# Altium PCB Модуль STM32F108VBT6.PcbDoc
Units mm, origin at the board's own origin, x right, y up, seen from the top; angles counter-clockwise.
Board outline 60 x 40 mm, 2 copper layers (Top Layer, Bottom Layer); 20 components, 88 nets, 238 pads, 50 vias.
Unrouted connection lines stored in the file: 28.
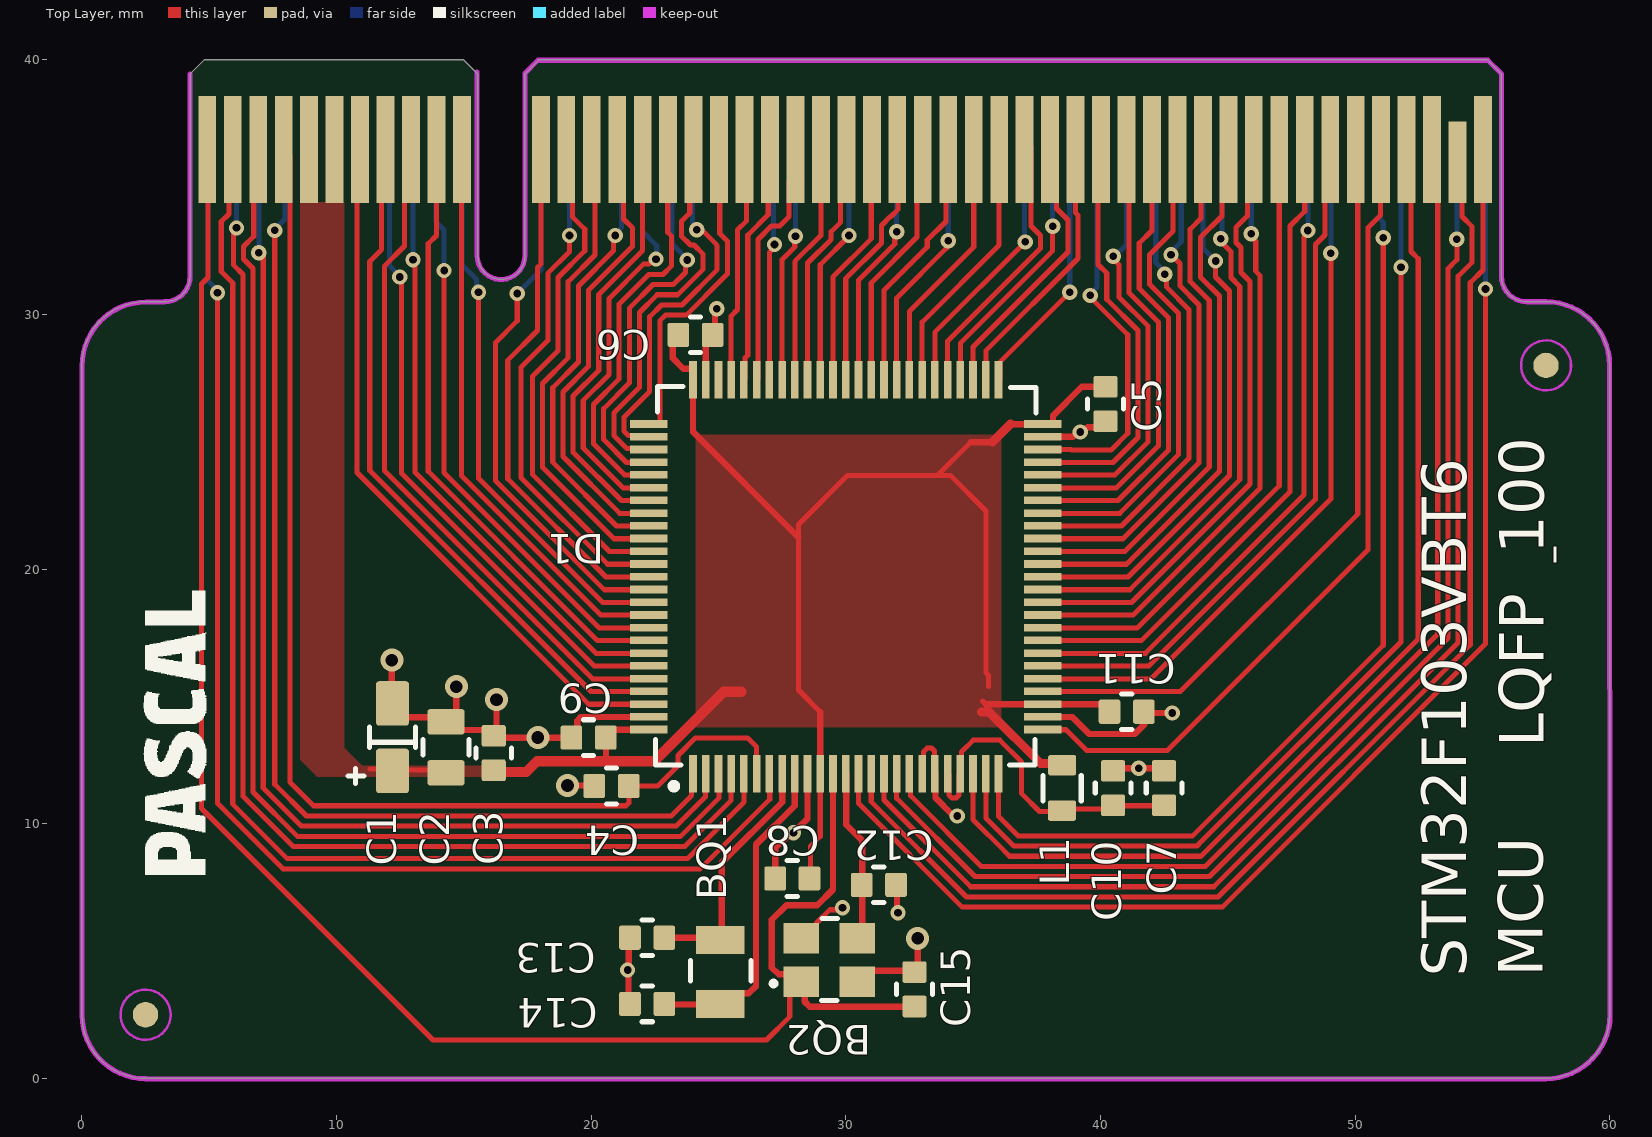
[diagram p0: Top Layer view]
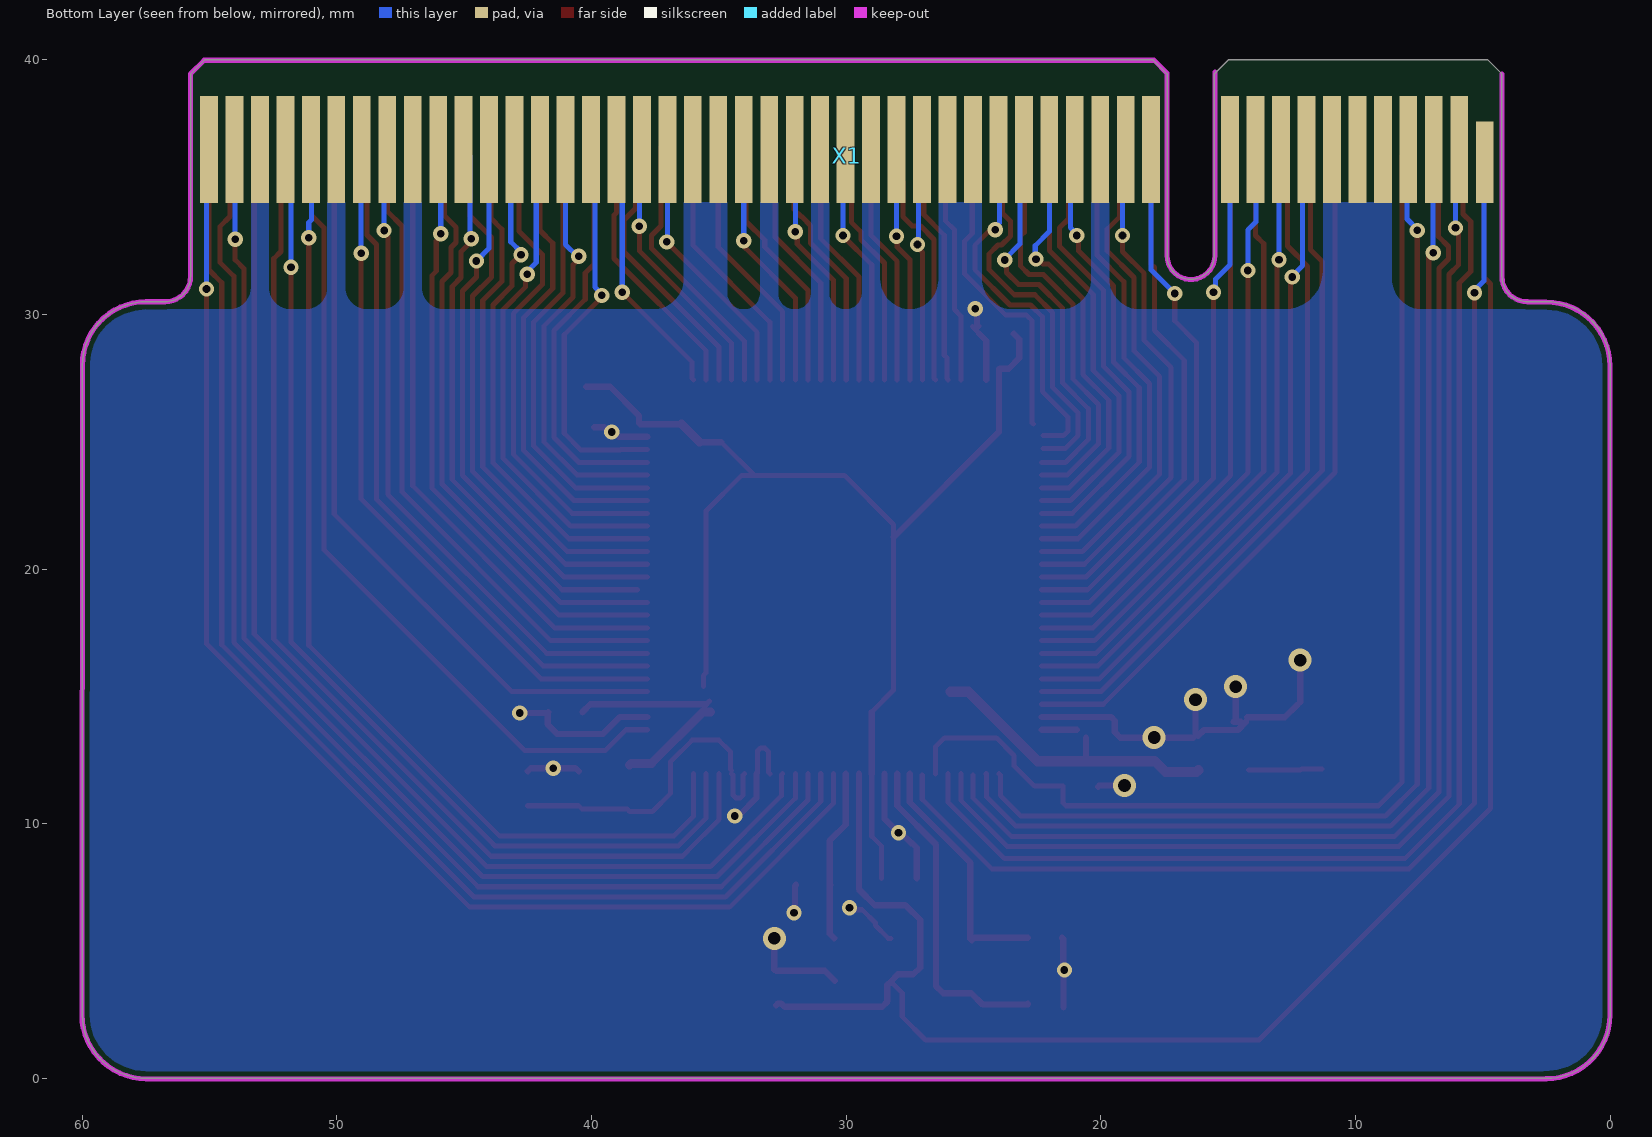
[diagram p1: Bottom Layer view, seen from below]
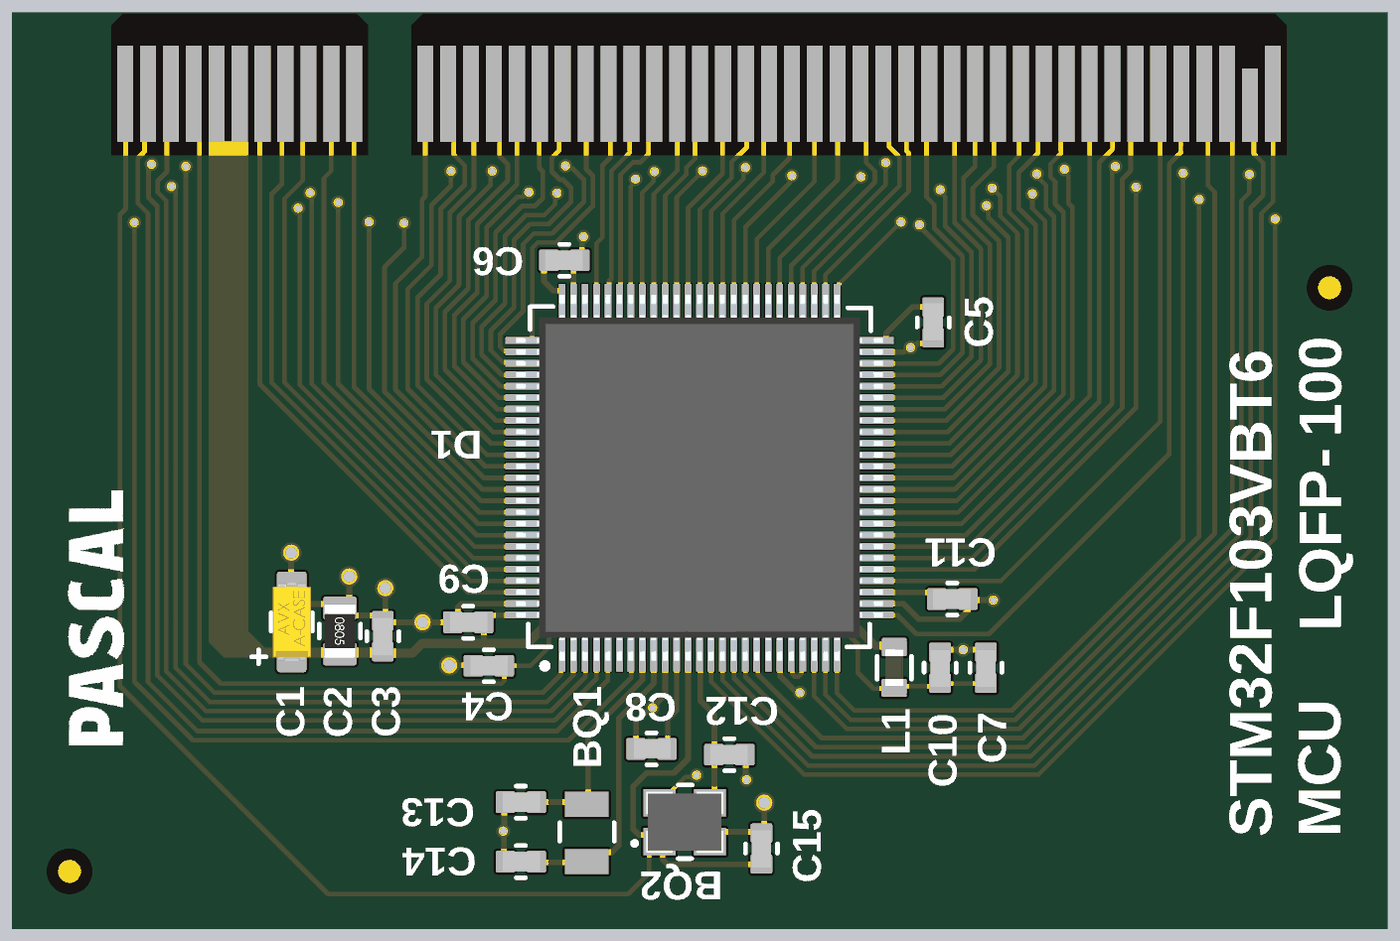
[diagram p2: 3D render of the assembled board from above, using the file's embedded part models]

## Layer stack, top to bottom
Top Solder: solder mask 0.0102, Solder Resist, Dk 3.5
Top Layer: signal copper 0.0356
Dielectric 1: dielectric 0.32, FR-4, Dk 4.8
Bottom Layer: signal copper 0.0356
Bottom Solder: solder mask 0.0102, Solder Resist, Dk 3.5

## Board outline
15,40 15.55,39.45 15.55,32.3 ccw(c16.475,32.3) 17.4,32.3 17.4,39.45 17.95,40 55.2,40 55.75,39.45 55.75,31.5 ccw(c56.75,31.5) 56.75,30.5 57.5,30.5 cw(c57.5,28) 60,28 60,2.5 cw(c57.5,2.5) 57.5,0 2.5,0 cw(c2.5,2.5) 0,2.5 0,28 cw(c2.5,28) 2.5,30.5 3.25,30.5 ccw(c3.25,31.5) 4.25,31.5 4.25,39.45 4.8,40

## Design rules (kind name [scope] priority, off if disabled: settings)
Clearance [All] p1: gap=0.2 ignorepadtopadclearanceinfootprint=FALSE
ComponentClearance [All] p1 off: gap=0.254 collisioncheckmode=3 verticalgap=0.254 showdistances=FALSE
Height [All] p1 off: minheight=0 maxheight=25.4 prefheight=12.7
PolygonConnect [All] p1: connectstyle=Direct reliefconductorwidth=0.254 reliefentries=4 polygonreliefangle="90 Angle" airgapwidth=0.254
RoutingVias [All] p1: holewidth=0.5 width=0.9 viastyle="Through Hole" minholewidth=0.3 minwidth=0.6 maxholewidth=0.711 maxwidth=1.27
SolderMaskExpansion [All] p1: expansion=-0.8 istentingtop=FALSE soldermaskfromhole=TRUE
Width [All] p1: maxlimit=0.5 minlimit=0.2 preferedwidth=0.25 minimp=50.000000 maximp=50.000000 favimp=50.000000
28 further rules are at their usual default settings.

## Classes and differential pairs
component class "Модуль STM32F108VBT6": BQ1 BQ2 C1 C2 C3 C4 C5 C6 C7 C8 C9 C10 C11 C12 C13 C14 C15 L1
component class "Модуль STM32F108VBT6_2": D1 X1

## Components (designator, comment, footprint, x,y, rotation, side; value= is the part's Value field where it differs from the comment)
BQ1 "3215" SMD3215_2P32768KHZ125PF10PPM 25.075,4.175 r270 top value="32,768 кГц"
BQ2 "кварцевый резонатор_1" SMD3225_4P20MHZ20PF10PPM 29.35,4.65 r0 top value="8 МГц"
C1 "A-case" K53-68_3216(A) 12.2,13.4 r90 top value="10 мк"
C2 "0805" K10-69B_2.0_1.25(0805) 14.3,13 r270 top value="1 мк"
C3 "0603" K10-79_1.6_0.8(0603) 16.175,12.775 r270 top value="0,1 мк"
C4 "0603" K10-79_1.6_0.8(0603) 20.8,11.483 r0 top value="0,01 мк"
C5 "0603" K10-79_1.6_0.8(0603) 40.2,26.483 r90 top value="0,01 мк"
C6 "0603" K10-79_1.6_0.8(0603) 24.1,29.2 r180 top value="0,01 мк"
C7 "0603" K10-79_1.6_0.8(0603) 42.5,11.4 r270 top value="0,1 мк"
C8 "0603" K10-79_1.6_0.8(0603) 27.9,7.85 r0 top value="0,01 мк"
C9 "0603" K10-79_1.6_0.8(0603) 19.9,13.383 r0 top value="0,01 мк"
C10 "0603" K10-79_1.6_0.8(0603) 40.5,11.4 r270 top value="0,01 мк"
C11 "0603" K10-79_1.6_0.8(0603) 41.033,14.4 r180 top value="0,01 мк"
C12 "0603" K10-79_1.6_0.8(0603) 31.3,7.6 r180 top value=30
C13 "0603" K10-79_1.6_0.8(0603) 22.2,5.525 r0 top value=15
C14 "0603" K10-79_1.6_0.8(0603) 22.2,2.925 r0 top value=15
C15 "0603" K10-79_1.6_0.8(0603) 32.7,3.5 r270 top value=30
D1 "(LQFP-48) Xilinx" QFP50P1600X1600X160-100N 30,19.7 r90 top value=STM32F103VBT6
L1 "0603" 742792651 38.5,11.4 r270 top value=TL160808
X1 "KONT_POLE_MEZ" 3113-112t_otv 31.026,35.978 r180 bottom

## Footprints (in the part's own frame and the unit in brackets; to place one, negate y for a bottom-side part, rotate by r counter-clockwise, add the part's x,y. Pads: shape width x height; smd on the part's side, far side on the other; paste and mask are expansions set on the pad)
3113-112t_otv [mm]
  rect 0.7x3.2 smd: A1(26.1,0)
  rect 0.7x4.2 smd: A2(25.1,0.5) A3(24.1,0.5) A4(23.1,0.5) A5(22.1,0.5) A6(21.1,0.5) A7(20.1,0.5) A8(19.1,0.5) A9(18.1,0.5) A10(17.1,0.5) A11(16.1,0.5) A12(13,0.5) A13(12,0.5) A14(11,0.5) A15(10,0.5) A16(9,0.5) A17(8,0.5) A18(7,0.5) A19(6,0.5) A20(5,0.5) A21(4,0.5) A22(3,0.5) A23(2,0.5) A24(1,0.5) A25(0,0.5) A26(-1,0.5) A27(-2,0.5) A28(-3,0.5) A29(-4,0.5) A30(-5,0.5) A31(-6,0.5) A32(-7,0.5) A33(-8,0.5) A34(-9,0.5) A35(-10,0.5) A36(-11,0.5) A37(-12,0.5) A38(-13,0.5) A39(-14,0.5) A40(-15,0.5) A41(-16,0.5) A42(-17,0.5) A43(-18,0.5) A44(-19,0.5) A45(-20,0.5) A46(-21,0.5) A47(-22,0.5) A48(-23,0.5) A49(-24,0.5)
  rect 0.7x4.2 smd far side: B1(26.1,0.5) B2(25.1,0.5) B3(24.1,0.5) B4(23.1,0.5) B5(22.1,0.5) B6(21.1,0.5) B7(20.1,0.5) B8(19.1,0.5) B9(18.1,0.5) B10(17.1,0.5) B11(16.1,0.5) B12(13,0.5) B13(12,0.5) B14(11,0.5) B15(10,0.5) B16(9,0.5) B17(8,0.5) B18(7,0.5) B19(6,0.5) B20(5,0.5) B21(4,0.5) B22(3,0.5) B23(2,0.5) B24(1,0.5) B25(0,0.5) B26(-1,0.5) B27(-2,0.5) B28(-3,0.5) B29(-4,0.5) B30(-5,0.5) B31(-6,0.5) B32(-7,0.5) B33(-8,0.5) B34(-9,0.5) B35(-10,0.5) B36(-11,0.5) B37(-12,0.5) B38(-13,0.5) B39(-14,0.5) B40(-15,0.5) B41(-16,0.5) B42(-17,0.5) B43(-18,0.5) B44(-19,0.5) B45(-20,0.5) B46(-21,0.5) B47(-22,0.5) B49(-24,0.5)
  rect 0.7x3.2 smd far side: B48(-23,0)
742792651 [mm]
  rrect20% 0.8x1.1 smd mask+0.102: 1(-0.9,0) 2(0.883,-0.008)
  silkscreen extent -0.5,-0.75 0.5,0.75, body extent -0.8,-0.4 0.8,0.4, height 0.78
K10-69B_2.0_1.25(0805) [mm]
  rrect20% 1x1.45 smd mask+0.1: 1(-1,0) 2(1,0)
  silkscreen extent -0.3,-0.9 0.3,0.9, body extent -1.15,-0.67 1.15,0.68, height 0.76
K10-79_1.6_0.8(0603) [mm]
  rrect20% 0.85x0.95 smd mask+0.1: 1(-0.675,0) 2(0.675,0)
  silkscreen extent -0.2,-0.7 0.2,0.7, body extent -0.8,-0.42 0.84,0.43, height 0.41
K53-68_3216(A) [mm] "Molded Capacitor, 2-Leads, Body 3,20x1,60mm, IPC Medium Density"
  rrect20% 1.75x1.3 smd mask+0.1: 1(-1.325,0) 2(1.325,0)
  silkscreen extent -0.4,-0.9 0.4,0.9, body extent -1.7,-0.84 1.7,0.84, height 1.71
QFP50P1600X1600X160-100N [mm]
  rect 1.475x0.3 smd mask+0.05: 1(-7.738,6) 2(-7.738,5.5) 3(-7.738,5) 4(-7.738,4.5) 5(-7.738,4) 6(-7.738,3.5) 7(-7.738,3) 8(-7.738,2.5) 9(-7.738,2) 10(-7.738,1.5) 11(-7.738,1) 12(-7.738,0.5) 13(-7.738,0) 14(-7.738,-0.5) 15(-7.738,-1) 16(-7.738,-1.5) 17(-7.738,-2) 18(-7.738,-2.5) 19(-7.738,-3) 20(-7.738,-3.5) 21(-7.738,-4) 22(-7.738,-4.5) 23(-7.738,-5) 24(-7.738,-5.5) 25(-7.738,-6) 51(7.738,-6) 52(7.738,-5.5) 53(7.738,-5) 54(7.738,-4.5) 55(7.738,-4) 56(7.738,-3.5) 57(7.738,-3) 58(7.738,-2.5) 59(7.738,-2) 60(7.738,-1.5) 61(7.738,-1) 62(7.738,-0.5) 63(7.738,0) 64(7.738,0.5) 65(7.738,1) 66(7.738,1.5) 67(7.738,2) 68(7.738,2.5) 69(7.738,3) 70(7.738,3.5) 71(7.738,4) 72(7.738,4.5) 73(7.738,5) 74(7.738,5.5) 75(7.738,6)
  rect 0.3x1.475 smd mask+0.05: 26(-6,-7.738) 27(-5.5,-7.738) 28(-5,-7.738) 29(-4.5,-7.738) 30(-4,-7.738) 31(-3.5,-7.738) 32(-3,-7.738) 33(-2.5,-7.738) 34(-2,-7.738) 35(-1.5,-7.738) 36(-1,-7.738) 37(-0.5,-7.738) 38(0,-7.738) 39(0.5,-7.738) 40(1,-7.738) 41(1.5,-7.738) 42(2,-7.738) 43(2.5,-7.738) 44(3,-7.738) 45(3.5,-7.738) 46(4,-7.738) 47(4.5,-7.738) 48(5,-7.738) 49(5.5,-7.738) 50(6,-7.738) 76(6,7.738) 77(5.5,7.738) 78(5,7.738) 79(4.5,7.738) 80(4,7.738) 81(3.5,7.738) 82(3,7.738) 83(2.5,7.738) 84(2,7.738) 85(1.5,7.738) 86(1,7.738) 87(0.5,7.738) 88(0,7.738) 89(-0.5,7.738) 90(-1,7.738) 91(-1.5,7.738) 92(-2,7.738) 93(-2.5,7.738) 94(-3,7.738) 95(-3.5,7.738) 96(-4,7.738) 97(-4.5,7.738) 98(-5,7.738) 99(-5.5,7.738) 100(-6,7.738)
  silkscreen extent -8.35,6.62 -8.1,6.87, body extent -8,-8 8,8, height 1.6
SMD3215_2P32768KHZ125PF10PPM [mm]
  rect 1.1x1.9 smd mask+0.102: 1(-1.25,0) 2(1.25,0)
  silkscreen extent -0.45,-1.17 0.35,1.2
SMD3225_4P20MHZ20PF10PPM [mm]
  rect 1.4x1.2 smd paste+0 mask+0.102: 1(-1.1,-0.85)
  rect 1.4x1.2 smd mask+0.102: 2(1.1,-0.85) 3(1.1,0.85) 4(-1.1,0.85)
  body extent -1.68,-1.33 1.68,1.33, height 0.9

## Part data
BQ1: library part "кварцевый резонатор", PartNumber="32,768 кГц 3215 SMD", Company=Mercury, Package=3215
BQ2: Package=0705, PartNumber=MQ-12.000-18, Company=Mercury
C1: library part C+, Package=A-case
C2 C3 C4 C5 C6 C7 C8 C9 C10 C11 C12 C13 C14 C15: library part C
  C2: Package=0805
  C3 C4 C5 C6 C7 C8 C9 C10 C11 C12 C13 C14 C15: Package=0603
D1: library part STM32F103VBT6, Package=LQFP-48, Company=Xilinx, PurtNamber=XC6SLX25-2FGG484C
L1: library part SH6028-5R0YLB, CurrentMax=2,4А, PartNumber=TL160808, Company="ABC Electronics Group", Package=0603
X1: library part 3113-112T

## Free pads (board coordinates)
  round 1 smd paste-1 mask+0.5: 1(2.5,2.5) 1(57.5,28)

## Via types
v1: diameter 0.6, hole 0.3, Top Layer to Bottom Layer, 44 vias
v2: diameter 0.9, hole 0.5, Top Layer to Bottom Layer, 6 vias

## Nets (pads, with @x,y where several pads share a name; then routed paths per layer and width w, separated by ;. In a path a pad name is that pad's centre, name@x,y a point inside that pad or via, vN(x,y) a via of type N, cw(c..) or ccw(c..) an arc to the next point about the centre after c; other vN are vias at no path point)
3V3: C1.1 C2.2 C3.2 C5.2 C6.2 C8.2 C9.2 C11.2 D1.11 D1.28 D1.50 D1.75 D1.100 L1.1 X1.B5 X1.B6 | length 74.1
  Top Layer w0.2: 11.325,12.158 12.125,12.158 12.175,12.108 C2.2@14.208,12.108 ; 20.583,12.483 20.608,12.458 ; C8.2@28.608,7.85 28.608,9.116 29,9.508 D1.11@29,11.887 ; 29,14.391 28.141,15.25 28.141,21.25 28.141,21.75 30.073,23.683 33.608,23.683 ; 34.908,24.983 33.608,23.683 ; 35.367,14.824 35.499,14.692 ; 35.608,15.383 35.608,15.825 35.508,15.925 35.508,22.283 34.108,23.683 33.608,23.683 ; D1.50@38.088,25.692 D1.50@38.138,25.742
  Top Layer w0.25: 20.583,12.483 C9.2@20.583,13.383 ; C9.2@20.942,13.692 D1.100@22.329,13.692 ; C6.2@23.425,29.25 23.208,29.033 23.208,28.288 23.621,27.875 23.975,27.875 24,27.85 D1.75 24,25.391 28.141,21.25 ; D1.11 29,14.391 ; 34.908,24.983 35.758,24.983 ; 35.499,14.692 40.058,14.692 40.358,14.392 C11.2@40.358,14.383 ; 36.467,25.692 D1.50@38.088,25.692 ; D1.50@38.138,25.742 38.138,26.024 39.271,27.158 C5.2 C5.2@40.208,27.158
  Top Layer w0.35: 35.333,14.383 35.634,14.383 37.648,12.369 38.448,12.369 L1.1@38.508,12.309 ; 35.758,24.983 36.467,25.692
  Top Layer w0.4: C3.2 16.242,12.033 17.452,12.033 17.877,12.458 20.608,12.458 22.477,12.458 25.202,15.183 25.908,15.183
BOOT0: D1.94 X1.A9 | length 24.9
  Top Layer w0.2: v1(13.003,32.15) 13.079,32.073 13.079,23.802 20.19,16.692 D1.94@22.329,16.692
  Bottom Layer w0.2: X1.A9 13.003,36.401 v1(13.003,32.15)
BOOT1: D1.37 X1.A39 | length 22.5
  Top Layer w0.2: D1.37@38.194,19.192 41.154,19.192 45.475,23.513 45.475,31.1 45.125,31.45 45.125,32.465 44.725,32.865 v1(44.725,32.973)
  Bottom Layer w0.2: v1(44.725,32.973) 44.776,33.024 44.776,36.228 X1.A39
GND: BQ2.2 BQ2.4 C1.2 C2.1 C3.1 C4.1 C5.1 C6.1 C7.1 C8.1 C9.1 C10.1 C11.1 C12.1 C13.1 C14.1 C15.1 D1.10 D1.19 D1.20 D1.27 D1.49 D1.74 D1.99 X1.A5 X1.A6 X1.A7 X1.A14 X1.A19 X1.A20 X1.A23 X1.A25 X1.A27 X1.A29 X1.A30 X1.A41 X1.A44 X1.A47 | length 47.9
  Top Layer w0.2: C6.1@24.775,29.25 25.047,29.522 C6.1@25.037,29.531 ; BQ2.4 28.35,5.5 28.85,6 28.85,6.1 29.373,6.623 29.798,6.623 v1(29.875,6.7) ; D1.19 33.049,12.011 33.049,12.824 33.2,12.975 33.367,12.975 33.484,12.858 33.484,11.978 D1.20 ; v1@34.166,10.374 34.316,10.374 v1(34.383,10.307)
  Top Layer w0.25: v2(12.175,16.425) 12.175,14.775 C1.2@12.2,14.75 ; C1.2@12.281,14.677 12.775,14.183 C2.1@14.258,14.183 ; C2.1 14.617,13.683 15.95,13.683 C3.1@16.183,13.45 ; C2.1@14.5,14 C2.1@14.791,14 ; C3.1 C3.1@16.183,13.45 ; C3.1@16.245,13.488 16.258,13.5 16.375,13.383 v2(17.908,13.383) C9.1 19.233,13.383 19.451,13.601 19.451,14.045 19.598,14.192 D1.99@22.329,14.192 ; v2(16.283,14.875) 16.283,13.55 C3.1@16.183,13.45 ; v2(19.075,11.5) 20.066,11.5 C4.1@20.108,11.458 ; C14.1@21.467,2.783 21.467,4.224 v1(21.433,4.258) 21.479,4.304 21.479,5.479 C13.1 ; D1.74 24.5,28.975 C6.1@24.775,29.25 ; C6.1@24.819,29.531 24.848,29.531 24.866,29.55 24.866,30.158 v1(24.933,30.225) ; C8.1@27.233,7.858 27.233,9.058 27.409,9.235 27.44,9.235 27.855,9.65 v1(27.95,9.65) 28.5,10.2 D1.10 ; BQ2.2@30.458,3.833 30.85,4.225 C15.1@32.75,4.225 ; C12.1 32.013,7.562 32.013,6.538 v1(32.05,6.5) ; C15.1@32.825,4.26 v2(32.825,5.5) ; D1.20@33.525,11.962 33.525,11.015 v1@34.166,10.374 ; D1.27@37.805,14.192 38.899,14.192 39.565,13.525 41.35,13.525 41.725,13.9 C11.1@41.725,14.367 ; D1.49@37.805,25.192 38.908,25.192 39.033,25.316 39.249,25.316 39.249,25.33 39.37,25.45 39.383,25.45 39.508,25.575 C5.1@39.9,25.575 ; C10.1@40.508,12.058 40.633,12.183 v1(41.508,12.183) 42.383,12.183 C7.1@42.508,12.058 ; C11.1@41.708,14.383 41.741,14.35 v1(42.825,14.35)
  other v1: 39.208,25.383
  other v2: 14.708,15.383
JTCK: D1.76 X1.B19 | length 12.5
  Top Layer w0.2: D1.76@22.642,25.692 22.7,25.75 22.7,29.749 22.926,29.975 23.731,29.975 25.225,31.469 25.35,31.594 25.35,32.883 25.225,33.008 25.052,33.181 25.052,36.452 X1.B19
JTDI: D1.77 X1.A18 | length 13.8
  Top Layer w0.2: D1.77@22.279,25.242 21.467,25.242 21.291,25.417 21.291,25.966 22.3,26.975 22.3,29.915 22.76,30.375 23.566,30.375 24.95,31.759 24.95,32.717 24.419,33.248 24.227,33.248 v1(24.15,33.325)
  Bottom Layer w0.2: X1.A18@23.983,35.633 23.983,33.6 24.15,33.433 v1(24.15,33.325)
JTDO: D1.89 X1.A12 | length 21.6
  Top Layer w0.2: v1(17.1,30.825) 17.1,29.75 16.25,28.9 16.25,23.46 20.518,19.192 D1.89@22.329,19.192
  Bottom Layer w0.2: v1(17.1,30.825) 18.026,31.751 X1.A12
JTMS: D1.72 X1.B20 | length 9
  Top Layer w0.2: D1.72 25.5,29.943 25.75,30.193 25.75,33.325 26.108,33.683 X1.B20@26.108,36.033 ; X1.B20@25.908,36.36 X1.B20
MCO: BQ2.1 C15.2 D1.12 X1.B1 | length 70.9
  Top Layer w0.2: X1.B1@4.95,36.478 4.95,31.45 4.7,31.2 4.7,10.6 13.789,1.511 26.886,1.511 27.8,2.425 27.8,3.35 BQ2.1
  Top Layer w0.25: D1.12 29.5,7.416 28.884,6.8 27.675,6.8 27.1,6.225 27.1,4.351 27.367,4.084 27.966,4.084 BQ2.1 28.383,3.667 28.383,3.017 28.592,2.808 32.427,2.808 32.558,2.939 32.686,2.939 C15.2@32.75,2.875
NetBQ1_1: BQ1.1 C13.2 D1.8 | length 9.8
  Top Layer w0.25: C13.2 24.975,5.525 BQ1.1 25.133,5.483 25.133,8.479 27.5,10.846 D1.8
NetBQ1_2: BQ1.2 C14.2 D1.9 | length 12.9
  Top Layer w0.25: C14.2 22.875,2.9 24.65,2.9 25.09,3.34 26.19,3.34 26.475,3.625 26.475,9.185 27.999,10.709 D1.9@27.999,11.961
NetBQ2_3: BQ2.3 C12.2 D1.13 | length 6.8
  Top Layer w0.25: D1.13@30.019,11.962 30.025,11.956 30.025,9.959 30.644,9.34 30.644,7.619 C12.2 30.644,7.581 30.644,5.675 BQ2.3@30.469,5.5
NetC7_2: C7.2 C10.2 D1.21 D1.22 L1.2 | length 13.1
  Top Layer w0.2: D1.21 34.05,11.912 34.05,11.125 34.167,11.008 34.333,11.008 34.45,11.125 34.45,11.912 D1.22 ; D1.22@34.5,12.088 34.549,12.137 34.549,12.824 35.008,13.283 36.049,13.283 36.908,12.424 36.908,11.183 37.608,10.483 38.508,10.483 38.611,10.586 40.386,10.586 40.508,10.708 C7.2@42.508,10.708
nJTRST: D1.90 X1.A11 | length 22
  Top Layer w0.2: v1(15.575,30.875) 15.575,23.569 20.452,18.692 D1.90@22.329,18.692
  Bottom Layer w0.2: X1.A11 14.926,31.958 15.498,31.385 15.498,30.952 v1(15.575,30.875)
nRST: D1.14 X1.A49 | length 51.2
  Top Layer w0.2: D1.14 30.5,10.803 34.578,6.725 44.785,6.725 55.125,17.065 v1(55.125,31)
  Bottom Layer w0.2: X1.A49 55.125,36.378 v1(55.125,31)
PA0: D1.23 X1.B46 | length 42.8
  Top Layer w0.2: D1.23 35,10.16 36.26,8.9 36.435,8.725 43.956,8.725 44.131,8.9 52.483,17.252 52.483,32.192 52.2,32.475 52.2,36.303 X1.B46
PA1: D1.24 X1.A46 | length 41.2
  Top Layer w0.2: D1.24 35.5,10.225 36.425,9.3 36.6,9.125 43.791,9.125 43.966,9.3 51.808,17.142 v1(51.808,31.858)
  Bottom Layer w0.2: v1(51.808,31.858) 51.808,36.26 X1.A46
PA2: D1.25 X1.A45 | length 39.7
  Top Layer w0.2: D1.25 36,10.291 36.766,9.525 43.625,9.525 51.108,17.008 v1(51.108,33.009)
  Bottom Layer w0.2: X1.A45 51.008,36.46 51.008,33.709 51.108,33.609 v1(51.108,33.009)
PA3: D1.26 X1.B45 | length 34
  Top Layer w0.2: D1.26@37.805,13.692 38.645,13.692 39.462,12.875 42.625,12.875 50.508,20.758 50.508,33.408 51.008,33.908 51.008,34.728 X1.B45@51.008,36.478 ; X1.B45@51.026,34.728 X1.B45
PA4: D1.29 X1.B44 | length 29.6
  Top Layer w0.2: D1.29@37.805,15.192 43.142,15.192 50.108,22.158 X1.B44@50.108,36.478 ; X1.B44 X1.B44@50.096,36.407
PA5: D1.30 X1.A43 | length 27.9
  Top Layer w0.2: D1.30@37.805,15.692 41.986,15.692 49.05,22.756 v1(49.05,32.4)
  Bottom Layer w0.2: X1.A43 49.05,36.453 v1(49.05,32.4)
PA6: D1.31 X1.B43 | length 29
  Top Layer w0.2: D1.31@37.805,16.192 41.902,16.192 48.45,22.74 48.45,32.749 48.822,33.121 48.822,36.392 X1.B43@48.908,36.478 ; X1.B43@49.026,34.728 X1.B43
PA7: D1.32 X1.A42 | length 26.3
  Top Layer w0.2: D1.32@37.805,16.692 41.767,16.692 48,22.925 48,33.042 48.15,33.192 v1(48.15,33.3)
  Bottom Layer w0.2: v1(48.15,33.3) X1.A42@48.15,36.353
PA8: D1.67 X1.B23 | length 9.7
  Top Layer w0.2: D1.67 28,32.088 29.026,33.114 X1.B23@29.026,36.728
PA9: D1.68 X1.A22 | length 9.3
  Top Layer w0.2: D1.68 27.5,32.154 27.999,32.653 27.999,33.049 v1(28.025,33.075)
  Bottom Layer w0.2: v1(28.025,33.075) X1.A22@28.025,36.477
PA10: D1.69 X1.A21 | length 9.2
  Top Layer w0.2: D1.69 27,32.437 27.204,32.642 v1(27.204,32.75)
  Bottom Layer w0.2: X1.A21 27.164,36.34 27.164,32.79 v1(27.204,32.75)
PA11: D1.70 X1.B22 | length 8.7
  Top Layer w0.2: D1.70 26.55,27.488 26.55,32.949 27.084,33.483 27.417,33.483 27.776,33.842 27.776,35.226 X1.B22@27.908,35.358
PA12: D1.71 X1.B21 | length 8.9
  Top Layer w0.2: D1.71 26.05,27.488 26.05,28.3 26.15,28.4 26.15,33.114 26.958,33.922 X1.B21@26.958,35.908
PB0: D1.35 X1.A40 | length 23.9
  Top Layer w0.2: D1.35@37.805,18.192 41.285,18.192 46.275,23.181 46.275,31.525 46.1,31.7 46.1,32.892 45.925,33.067 v1(45.925,33.175)
  Bottom Layer w0.2: v1(45.925,33.175) X1.A40@45.925,36.377
PB1: D1.36 X1.B40 | length 22.8
  Top Layer w0.2: D1.36@37.805,18.692 41.22,18.692 45.875,23.347 45.875,31.3 45.525,31.65 45.525,32.631 45.325,32.831 45.325,33.424 45.776,33.874 X1.B40@45.776,35.776
PB5: D1.91 X1.B11 | length 22.2
  Top Layer w0.2: X1.B11@14.908,36.145 14.908,23.67 20.387,18.192 D1.91@22.329,18.192
PB6: D1.92 X1.A10 | length 23.5
  Top Layer w0.2: v1(14.225,31.725) 14.225,23.788 20.321,17.692 D1.92@22.329,17.692
  Bottom Layer w0.2: X1.A10 13.908,36.46 13.908,33.642 14.225,33.325 v1(14.225,31.725)
PB7: D1.93 X1.B10 | length 24.2
  Top Layer w0.2: X1.B10 13.926,33.101 13.603,32.778 13.603,23.844 20.255,17.192 D1.93@22.329,17.192
PB8: D1.95 X1.A8 | length 25.9
  Top Layer w0.2: v1(12.479,31.475) 12.55,31.404 12.55,23.766 20.124,16.192 D1.95@22.329,16.192
  Bottom Layer w0.2: X1.A8 12.075,36.328 12.075,31.919 12.479,31.515 v1(12.479,31.475)
PB9: D1.96 X1.B9 | length 26.8
  Top Layer w0.2: X1.B9@13.008,36.357 12.676,36.025 12.676,32.688 11.879,31.892 11.879,23.871 20.058,15.692 D1.96@22.329,15.692
PB10: D1.47 X1.B34 | length 16.1
  Top Layer w0.2: D1.47@37.805,24.192 40.497,24.192 41.475,25.169 41.475,29.372 40.25,30.597 40.25,31.625 39.908,31.967 39.908,36.36 X1.B34
PB11: D1.48 X1.A34 | length 15.5
  Top Layer w0.2: D1.48@37.805,24.692 38.851,24.692 38.859,24.683 40.423,24.683 41.075,25.335 41.075,29.206 39.599,30.682 v1(39.599,30.749)
  Bottom Layer w0.2: v1(39.599,30.749) 39.599,30.807 39.875,31.083 39.875,36.327 X1.A34
PB12: D1.51 X1.A33 | length 10.3
  Top Layer w0.2: D1.51 36.05,27.488 36.05,28.125 v1(38.796,30.871)
  Bottom Layer w0.2: v1(38.796,30.871) 38.796,36.248 X1.A33
PB13: D1.52 X1.B33 | length 10.9
  Top Layer w0.2: D1.52 35.5,28.575 39.125,32.2 39.125,33.9 39.026,33.999 X1.B33@39.026,36.752
PB14: D1.53 X1.B32 | length 10.9
  Top Layer w0.2: D1.53 35,28.725 38.725,32.45 38.725,33.714 38.276,34.163 38.276,36.228 X1.B32
PB15: D1.54 X1.A32 | length 10.6
  Top Layer w0.2: D1.54 34.5,28.875 38.125,32.5 v1(38.125,33.466)
  Bottom Layer w0.2: X1.A32 38.125,36.379 v1(38.125,33.466)
PC0: D1.15 X1.B49 | length 49.9
  Top Layer w0.2: D1.15 31,10.869 34.744,7.125 44.619,7.125 54.525,17.031 54.525,31.249 55.026,31.749 X1.B49
PC1: D1.16 X1.B48 | length 48.5
  Top Layer w0.2: D1.16 31.5,10.934 34.909,7.525 44.453,7.525 54.05,17.122 54.05,31.5 54.6,32.05 54.6,33.45 54.2,33.85 X1.B48@54.2,36.303
PC2: D1.17 X1.A48 | length 47.1
  Top Layer w0.2: D1.17 32,11 35.075,7.925 44.288,7.925 53.65,17.287 53.65,31.8 54,32.15 v1(54,32.95)
  Bottom Layer w0.2: v1(54,32.95) 54,36.452 X1.A48
PC3: D1.18 X1.B47 | length 45.6
  Top Layer w0.2: D1.18 32.55,11.912 32.55,11.1 35.325,8.325 44.122,8.325 53.25,17.453 53.25,36.253 X1.B47
PC4: D1.33 X1.B42 | length 25.7
  Top Layer w0.2: D1.33@37.805,17.192 41.606,17.192 47.45,23.035 47.45,33.475 48.026,34.051 X1.B42
PC5: D1.34 X1.B41 | length 24.7
  Top Layer w0.2: D1.34@37.805,17.692 41.446,17.692 47.026,23.271 X1.B41
PC6: D1.63 X1.B26 | length 10.3
  Top Layer w0.2: D1.63 30,31.412 31.4,32.812 31.4,33.499 31.751,33.85 31.775,33.85 32.058,34.133 X1.B26@32.058,36.833
PC7: D1.64 X1.B25 | length 9.7
  Top Layer w0.2: D1.64 29.5,31.478 31,32.978 31,36.452 X1.B25
PC8: D1.65 X1.A24 | length 9.5
  Top Layer w0.2: D1.65 29,31.957 30.125,33.082 v1(30.125,33.1)
  Bottom Layer w0.2: X1.A24 30.125,36.378 v1(30.125,33.1)
PC9: D1.66 X1.B24 | length 9.9
  Top Layer w0.2: D1.66 28.5,32.022 29.426,32.948 29.426,33.251 29.8,33.625 X1.B24@29.8,36.775
PC10: D1.78 X1.B18 | length 15.4
  Top Layer w0.2: D1.78@22.279,24.742 21.401,24.742 20.891,25.252 20.891,26.132 21.9,27.14 21.9,30.081 22.594,30.775 23.4,30.775 24.4,31.775 24.4,32.365 24.04,32.725 23.901,32.725 23.55,33.076 23.55,33.664 23.875,33.989 23.875,36.327 X1.B18
PC11: D1.79 X1.A17 | length 15.7
  Top Layer w0.2: D1.79@22.329,24.192 21.386,24.192 20.491,25.086 20.491,26.297 21.5,27.306 21.5,29.334 21.5,30.247 22.428,31.175 23.225,31.175 23.702,31.652 23.702,32.061 v1(23.779,32.138)
  Bottom Layer w0.2: X1.A17 23.175,36.328 23.175,32.775 23.779,32.172 v1(23.779,32.138)
PC12: D1.80 X1.B17 | length 16
  Top Layer w0.2: D1.80@22.329,23.692 21.32,23.692 20.091,24.92 20.091,26.463 21.1,27.472 21.1,30.412 22.263,31.575 22.826,31.575 23.15,31.899 23.15,33.09 23.009,33.231 23.009,36.461 X1.B17
PC13: D1.7 X1.A1 | length 50.2
  Top Layer w0.2: v1(5.325,30.85) 5.325,10.804 7.899,8.229 24.282,8.229 27.017,10.964 D1.7@27.017,11.904
  Bottom Layer w0.2: X1.A1 4.95,35.953 4.95,31.324 5.325,30.949 v1(5.325,30.85)
PD0: D1.81 X1.A16 | length 16.6
  Top Layer w0.2: D1.81@22.329,23.192 21.254,23.192 19.691,24.755 19.691,26.629 20.7,27.637 20.7,30.623 22.052,31.975 22.27,31.975 22.47,32.175 v1(22.55,32.175)
  Bottom Layer w0.2: X1.A16 22.026,33.256 22.578,32.704 22.578,32.203 v1(22.55,32.175)
PD1: D1.82 X1.B16 | length 16.7
  Top Layer w0.2: X1.B16@21.908,36.278 X1.B16@22.108,36.478 ; X1.B16@22.025,36.077 22.025,32.514 20.3,30.789 20.3,27.803 19.291,26.794 19.291,24.589 21.189,22.692 D1.82@22.329,22.692
PD2: D1.83 X1.B15 | length 17.8
  Top Layer w0.2: X1.B15 21.276,36.228 21.276,33.754 21.625,33.405 21.625,32.679 19.9,30.954 19.9,27.969 18.891,26.96 18.891,24.423 21.123,22.192 D1.83@22.329,22.192
PD3: D1.84 X1.A15 | length 18.3
  Top Layer w0.2: v1(20.95,33.1) 20.88,33.03 20.88,32.5 19.5,31.12 19.5,28.134 18.491,27.126 18.491,24.2 20.999,21.692 D1.84@22.329,21.692
  Bottom Layer w0.2: v1(20.95,33.1) 20.95,33.167 21.2,33.417 21.2,36.303 X1.A15
PD4: D1.85 X1.B14 | length 18.8
  Top Layer w0.2: X1.B14@19.95,36.437 20.15,36.237 20.15,32.336 19.1,31.286 19.1,28.3 18.091,27.291 18.091,24 20.899,21.192 D1.85@22.329,21.192
PD5: D1.86 X1.B13 | length 19.8
  Top Layer w0.2: X1.B13 19.276,36.228 19.276,33.823 19.75,33.349 19.75,32.501 18.7,31.451 18.7,28.575 17.691,27.566 17.691,23.725 20.724,20.692 D1.86@22.329,20.692
PD6: D1.87 X1.A13 | length 20.2
  Top Layer w0.2: v1(19.15,33.1) 19.15,32.467 18.3,31.617 18.3,28.975 17.25,27.925 17.25,23.591 20.649,20.192 D1.87@22.329,20.192
  Bottom Layer w0.2: X1.A13 19.15,36.353 v1(19.15,33.1)
PD7: D1.88 X1.B12 | length 20.7
  Top Layer w0.2: X1.B12 18.026,31.976 17.894,31.844 17.894,29.369 16.725,28.2 16.725,23.55 20.584,19.692 D1.88@22.329,19.692
PD8: D1.55 X1.B31 | length 10.9
  Top Layer w0.2: D1.55 34,28.951 37.65,32.601 37.65,33.099 37.276,33.473 37.276,36.605 X1.B31@37.208,36.673
PD9: D1.56 X1.A31 | length 10.5
  Top Layer w0.2: D1.56 33.5,29.3 v1(37.05,32.85)
  Bottom Layer w0.2: X1.A31 37.026,32.874 v1(37.05,32.85)
PD10: D1.57 X1.B30 | length 10.3
  Top Layer w0.2: D1.57 33,29.7 36.026,32.726 X1.B30
PD11: D1.58 X1.B29 | length 10.1
  Top Layer w0.2: D1.58 32.5,30.125 35.026,32.651 X1.B29
PD12: D1.59 X1.A28 | length 9.9
  Top Layer w0.2: D1.59 32,30.65 33.948,32.598 33.948,32.823 v1(34.025,32.9)
  Bottom Layer w0.2: v1(34.025,32.9) X1.A28
PD13: D1.60 X1.B28 | length 10.1
  Top Layer w0.2: D1.60 31.5,30.95 33.201,32.651 33.201,32.924 33.933,33.657 X1.B28@33.933,36.501
PD14: D1.61 X1.B27 | length 11
  Top Layer w0.2: D1.61 31,31.241 32.801,33.042 32.801,37.281 X1.B27@33.078,37.558
PD15: D1.62 X1.A26 | length 9.7
  Top Layer w0.2: D1.62 30.5,31.347 31.923,32.77 31.923,33.173 v1(32,33.25)
  Bottom Layer w0.2: v1(32,33.25) 32,36.452 X1.A26
PE0: D1.97 X1.B8 | length 27.5
  Top Layer w0.2: X1.B8 11.775,36.327 11.775,32.55 11.308,32.083 11.308,23.876 19.993,15.192 D1.97@22.329,15.192
PE1: D1.98 X1.B7 | length 27.1
  Top Layer w0.2: X1.B7@10.808,35.646 10.808,23.792 19.908,14.692 D1.98@22.329,14.692
PE2: D1.1 X1.A4 | length 43.1
  Top Layer w0.2: v1(7.575,33.302) 7.575,11.551 8.819,10.308 23.148,10.308 23.95,11.11 23.95,11.912 D1.1
  Bottom Layer w0.2: v1(7.575,33.302) 7.575,33.351 7.975,33.751 X1.A4@7.975,36.428
PE3: D1.2 X1.A3 | length 44.2
  Top Layer w0.2: v1(6.95,32.425) 7.125,32.25 7.125,11.408 8.629,9.904 23.337,9.904 24.492,11.059 24.492,11.954 D1.2
  Bottom Layer w0.2: v1(6.95,32.425) X1.A3@6.95,36.152
PE4: D1.3 X1.B3 | length 45.9
  Top Layer w0.2: X1.B3@6.75,36.302 6.75,33.074 6.35,32.674 6.35,32.176 6.725,31.801 6.725,11.243 8.463,9.504 23.516,9.504 25.017,11.005 D1.3@25.017,11.904
PE5: D1.4 X1.A2 | length 47.5
  Top Layer w0.2: v1(6.075,33.4) 5.95,33.275 5.998,33.227 5.95,33.178 5.95,31.95 6.325,31.575 6.325,11.077 8.298,9.104 23.682,9.104 25.5,10.923 D1.4
  Bottom Layer w0.2: X1.A2 6.075,36.328 v1(6.075,33.4)
PE6: D1.5 X1.B2 | length 49.1
  Top Layer w0.2: X1.B2 5.775,36.327 5.775,33.949 5.475,33.649 5.475,31.69 5.925,31.24 5.925,10.77 8.065,8.629 23.781,8.629 26,10.849 D1.5
PE7: D1.38 X1.A38 | length 22.2
  Top Layer w0.2: D1.38@37.805,19.692 41.088,19.692 45.075,23.678 45.075,30.925 44.525,31.475 v1(44.525,32.103)
  Bottom Layer w0.2: X1.A38 44.026,32.603 v1(44.525,32.103)
PE8: D1.39 X1.B39 | length 22.2
  Top Layer w0.2: D1.39@37.805,20.192 41.023,20.192 44.675,23.844 44.675,30.725 43.925,31.475 43.925,33.022 44.776,33.872 44.776,36.228 X1.B39 ; X1.B39@44.908,36.583 X1.B39@45.208,36.883
PE9: D1.40 X1.B38 | length 19.8
  Top Layer w0.2: D1.40@37.805,20.692 40.957,20.692 44.275,24.01 44.275,30.55 43.525,31.3 43.525,33.35 43.95,33.775 X1.B38@43.95,35.075 ; X1.B38@43.776,36.228 X1.B38
PE10: D1.41 X1.A37 | length 20.3
  Top Layer w0.2: D1.41@37.805,21.192 40.891,21.192 43.875,24.175 43.875,30.375 43.125,31.125 43.125,32 v1(42.775,32.35)
  Bottom Layer w0.2: v1(42.775,32.35) 42.775,32.458 43.175,32.858 43.175,36.328 X1.A37
PE11: D1.42 X1.A36 | length 19.5
  Top Layer w0.2: D1.42@37.805,21.692 40.826,21.692 43.475,24.341 43.475,30.2 42.602,31.073 42.602,31.509 v1(42.525,31.585)
  Bottom Layer w0.2: X1.A36 42.175,36.328 42.175,32.044 42.525,31.694 v1(42.525,31.585)
PE12: D1.43 X1.B37 | length 19.1
  Top Layer w0.2: D1.43@37.805,22.192 40.76,22.192 43.075,24.507 43.075,30.034 41.925,31.184 41.925,32.349 42.85,33.274 42.85,36.302 X1.B37
PE13: D1.44 X1.B36 | length 18.5
  Top Layer w0.2: D1.44@37.805,22.692 40.694,22.692 42.675,24.672 42.675,29.869 41.525,31.019 41.525,32.8 42.026,33.301 X1.B36@42.026,36.783 ; X1.B36@42.208,36.405 X1.B36@42.243,36.37
PE14: D1.45 X1.B35 | length 17.3
  Top Layer w0.2: D1.45@37.805,23.192 40.629,23.192 42.275,24.838 42.275,29.703 41.125,30.853 41.125,36.461 X1.B35@41.108,36.478
PE15: D1.46 X1.A35 | length 16.9
  Top Layer w0.2: D1.46@37.805,23.692 40.563,23.692 41.875,25.004 41.875,29.537 40.725,30.687 40.725,31.966 40.508,32.183 v1(40.508,32.283)
  Bottom Layer w0.2: v1(40.508,32.283) 40.567,32.283 41.026,32.742 X1.A35
VBAT: C4.2 D1.6 X1.B4 | length 46.6
  Top Layer w0.2: X1.B4 8.175,36.228 8.175,11.634 9.101,10.708 21.366,10.708 21.483,10.825 21.483,11.483 22.615,11.483 23.408,12.276 23.408,12.682 24.101,13.375 26.141,13.375 26.5,13.016 D1.6
pads on no net: D1.73
copper on no net: | length 1.3
  Top Layer w0.25: 14.708,14.083 14.708,15.383

## Polygon pours and split planes (outlines as drawn)
3V3 on Top Layer "3V3_L01_P001" (solid, remove dead copper, pour order 1): 9.241,11.85 8.575,12.516 8.575,34.4 10.308,34.4 10.308,12.983 11.008,12.283 16.175,12.283 16.175,11.85
3V3 on Top Layer "3V3_L01_P000" (solid, pour order 0): 24.108,25.283 24.108,13.783 36.108,13.783 36.108,25.283
GND on Bottom Layer "Bottom Layer-GND" (solid, remove dead copper, pour order 15): 0,0 60.55,0 60.55,30.2 54.225,30.2 cw(c54.225,31.05) 53.375,31.05 53.375,34.425 52.675,34.425 52.675,31.05 cw(c51.825,31.05) 51.825,30.2 51.225,30.2 cw(c51.225,31.05) 50.375,31.05 50.375,34.4 49.675,34.4 49.675,31.05 cw(c48.825,31.05) 48.825,30.2 48.225,30.2 cw(c48.225,31.05) 47.375,31.05 47.375,34.4 46.675,34.4 46.675,31.05 cw(c45.825,31.05) 45.825,30.2 37.575,30.2 cw(c37.575,31.4) 36.375,31.4 36.375,34.4 34.675,34.4 34.675,30.825 cw(c34.056,30.825) 34.113,30.208 cw(c34.025,30.853) 33.375,30.853 33.375,34.4 32.675,34.4 32.675,30.824 cw(c32.051,30.824) 31.999,30.202 cw(c31.998,30.825) 31.375,30.825 31.375,34.4 30.675,34.4 30.675,30.85 cw(c30.025,30.85) 30.025,30.2 cw(c30.025,30.85) 29.375,30.85 29.375,34.4 28.675,34.4 28.675,31.4 cw(c27.476,31.4) 27.476,30.201 cw(c27.525,31.35) 26.375,31.35 26.375,34.4 24.675,34.4 24.675,31.4 cw(c23.475,31.4) 23.475,30.2 21.575,30.2 cw(c21.575,31.4) 20.375,31.4 20.375,34.4 19.675,34.4 19.675,31.4 cw(c18.475,31.4) 18.475,30.2 12.775,30.2 cw(c12.775,31.7) 11.275,31.7 11.275,34.4 8.575,34.4 8.575,31.4 cw(c7.375,31.4) 7.375,30.2 0,30.2

## Keep-outs
Top Layer:
  circle w0.1: c57.5,28 r0.983
  circle w0.1: c2.5,2.5 r0.983
Keep-Out Layer:
  lines w0.2: 0,2.525 0,27.975 ; 0.008,2.486 ccw(c2.508,2.486) 2.508,-0.014 ; 0.011,27.992 cw(c2.511,27.992) 2.511,30.492 3.242,30.492 ; 2.55,-0.017 57.491,-0.017 ccw(c57.491,2.512) 60.02,2.512 60,28 ccw(c57.5,28) 57.5,30.5 56.75,30.5 cw(c56.75,31.5) 55.75,31.5 55.75,39.45 55.217,39.983 54.608,39.983 18.108,39.983 17.908,39.983 17.4,39.475 17.4,32.3 ; 3.25,30.5 ccw(c3.25,31.5) 4.25,31.5 4.25,39.45 ; 15.525,32.3 15.525,39.525 ; 15.525,32.312 ccw(c16.463,32.312) 17.4,32.312

## Silkscreen, mask and mechanical layers (free items; w line width, h text height)
Top Overlay:
  drawing of 19 lines, arcs and shapes, not listed
  text "-" at 56.661,21 h3 r270
  text "LQFP  100" at 58.003,13 h3 r90
  text "STM32F103VBT6" at 54.964,4 h3 r90
  text "MCU" at 57.964,4 h3 r90
Mechanical 4 (Mech5):
  lines w0.1: -60.345,3.713 -60.336,3.722 ; 4.326,31.708 4.326,31.501 cw(c4.325,31.501) 4.325,31.5 cw(c3.325,31.5) 3.325,30.5 3.118,30.5 2.5,30.5 ccw(c2.5,28) 0,28 0,2.5 ccw(c2.5,2.5) 2.5,0 57.5,0 ccw(c57.5,2.5) 60,2.5 60,28 ccw(c57.5,28) 57.5,30.5 56.65,30.5 cw(c56.65,31.5) 55.65,31.5